# EAGLE board poured (EAGLE 7.4.0)
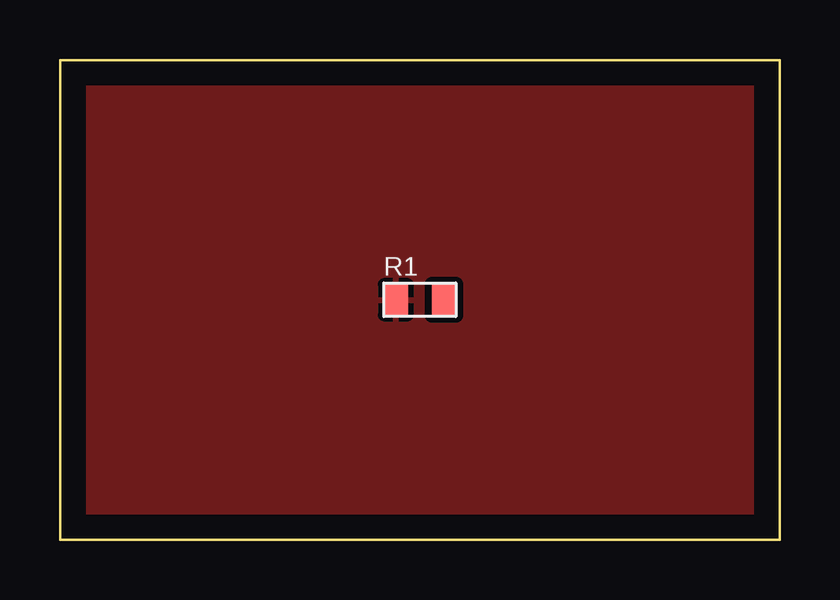
[diagram p0: board, top side]

Size 30 x 20 mm. Coordinates in mm from the lower left corner, seen from the top.
Outline: 0,0 30,0 30,20 0,20 0,0
Copper layers used: Top

## Footprints (pad centres in the part's own frame; a part is rotated, then mirrored left to right if it is on the bottom)
R0805 = smd 1 x 1.3: 1 -1,0; 2 1,0

## Placement (x,y rotation side)
R1  10k  [R0805]  15,10 0 top

## Library data of the parts
R1 = synth

## Nets
GND: R1.1

## Tracks (layer width: path | path; a pad name or v marks a point on that pad's centre or on a via)
GND
  pour Top (isolate 0.3): 0.5,0.5 29.5,0.5 29.5,19.5 0.5,19.5